# Altium PCB PCB2.PcbDoc
Units mm, origin at the board's own origin, x right, y up, seen from the top; angles counter-clockwise.
Board outline 152.4 x 101.6 mm, 2 copper layers (Top Layer, Bottom Layer); 29 components, 36 nets, 113 pads, 2 vias.
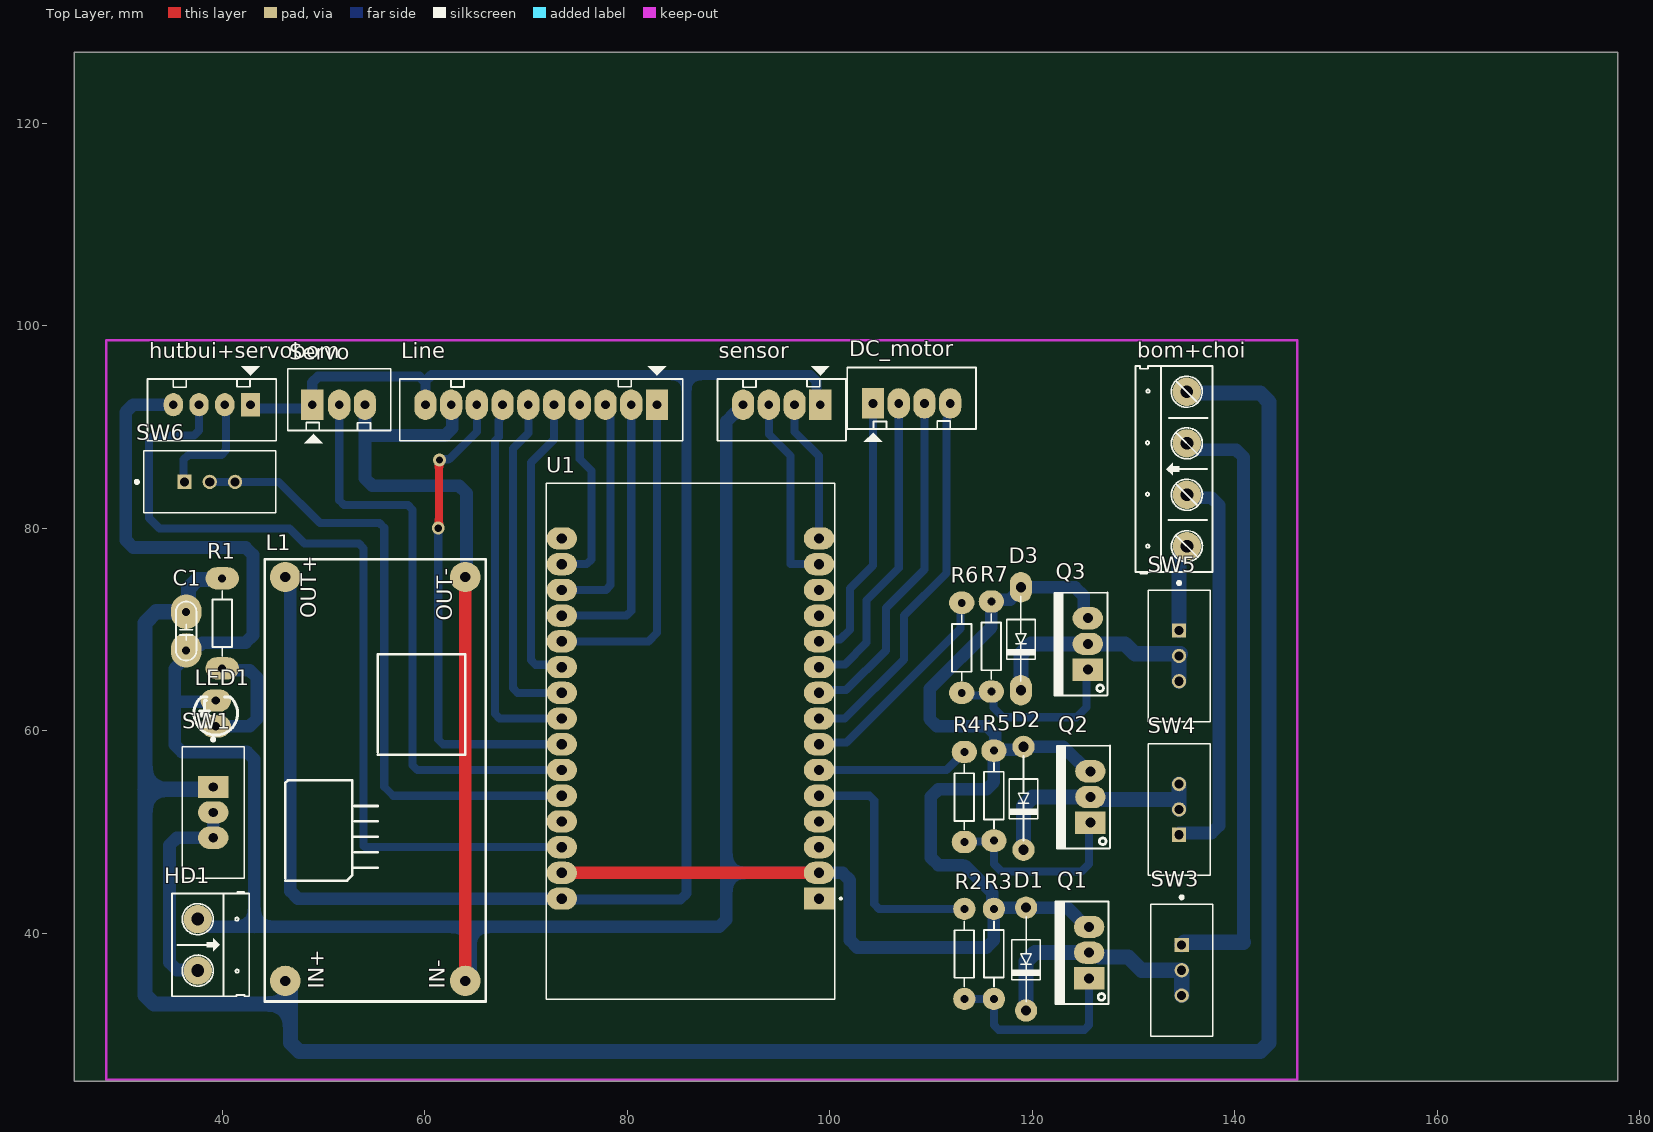
[diagram p0: Top Layer view]
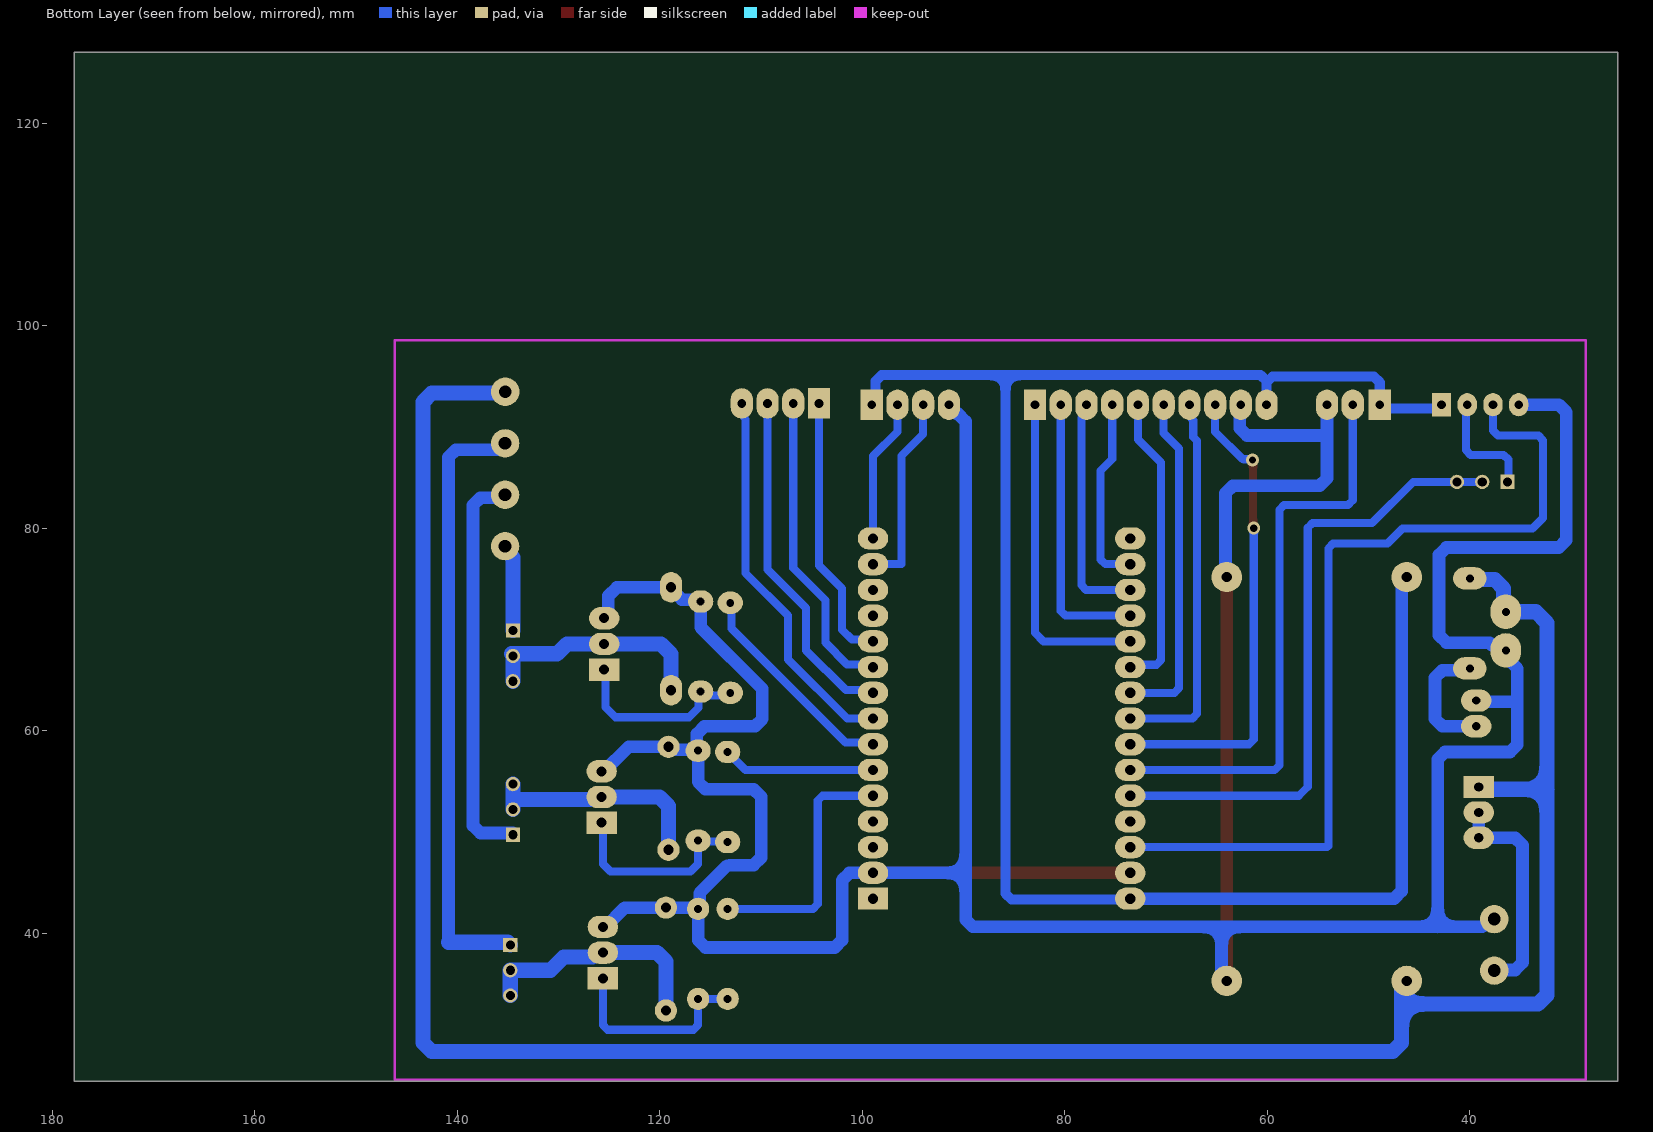
[diagram p1: Bottom Layer view, seen from below]
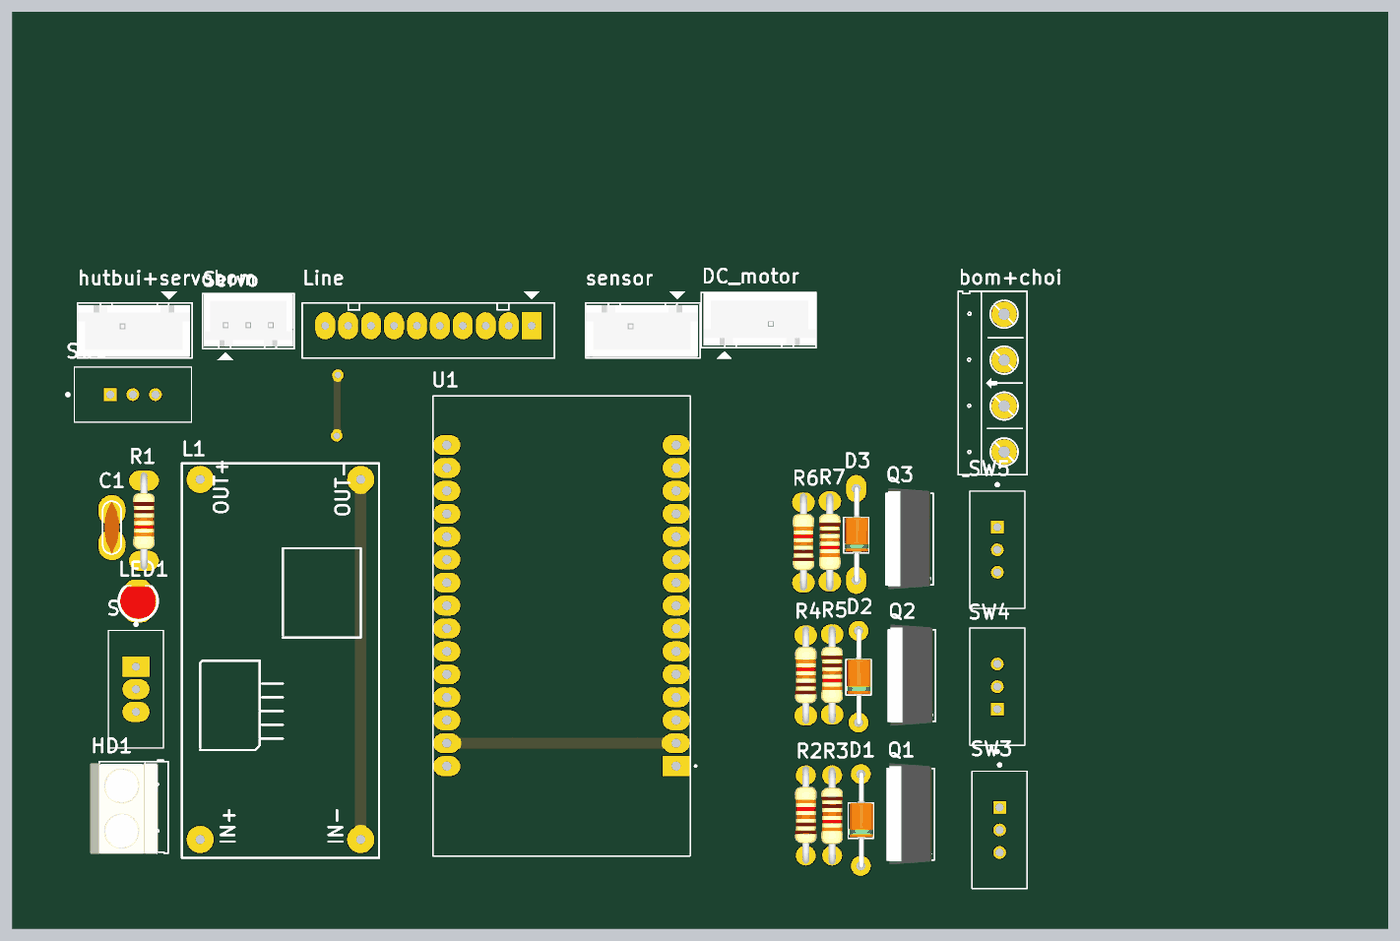
[diagram p2: 3D render of the assembled board from above, using the file's embedded part models]

## Layer stack, top to bottom
Top Solder: solder mask 0.0102, Solder Resist, Dk 3.5
Top Layer: signal copper 0.0356
Dielectric 1: dielectric 0.32, FR-4, Dk 4.8
Bottom Layer: signal copper 0.0356
Bottom Solder: solder mask 0.0102, Solder Resist, Dk 3.5

## Board outline
25.4,25.4 177.8,25.4 177.8,127 25.4,127

## Design rules (kind name [scope] priority, off if disabled: settings)
Clearance [All] p1: gap=0.254 ignorepadtopadclearanceinfootprint=FALSE except(0: Arc-Hole Track-Hole SMDPad-Hole THPad-Hole Via-Hole Fill-Hole Poly-Hole Region-Hole Text-Hole)
PolygonConnect [All] p1: connectstyle=Relief reliefconductorwidth=0.254 reliefentries=4 polygonreliefangle="90 Angle" airgapwidth=0.254
RoutingVias [All] p1: holewidth=0.711 width=1.27 viastyle="Through Hole" minholewidth=0.711 minwidth=1.27 maxholewidth=0.711 maxwidth=1.27
SolderMaskExpansion [All] p1: expansion=0.102 istentingtop=FALSE
Width [All] p1: maxlimit=1.5 minlimit=0.8 preferedwidth=1
30 further rules are at their usual default settings.

## Components (designator, comment, footprint, x,y, rotation, side; value= is the part's Value field where it differs from the comment)
bom+choi "Header 4" HED4 135.257,78.23 r90 top
C1 "Cap Non-Pol" CN1.5 36.449,67.945 r90 top value=100pF
D1 "Diode" DIO-1A#1 119.38,42.545 r270 top value=1N5007
D2 "Diode" DIO-1A#1 119.126,58.42 r270 top value=1N5007
D3 "Diode" DIO-1A#2 118.872,74.168 r270 top value=1N5007
DC_motor "JP4" CON4#1 104.267,92.329 r0 top value="Connector 4"
HD1 "Header 2" HED2 37.592,41.402 r270 top
hutbui+servobom "JP4" CON4#2 42.799,92.202 r180 top value="Connector 4"
L1 "BUCK_LM2596" BUCK_LM2596 54.356,54.864 r90 top
LED1 "LED_R_3" LED3R 39.37,60.452 r90 top value=Red
Line "JP10" CON10 82.931,92.202 r180 top value="Connector 10"
Q1 "TIP122" QTO-220 125.603,35.56 r90 top
Q2 "TIP122" QTO-220 125.73,50.927 r90 top
Q3 "TIP122" QTO-220 125.476,66.04 r90 top
R1 "Res1" R1/4W#1 40.005,66.167 r90 top value=10K
R2 "Res1" R1/4W#2 113.284,42.418 r270 top value=10K
R3 "Res1" R1/4W#2 116.205,33.528 r90 top value=10K
R4 "Res1" R1/4W#3 113.284,57.912 r270 top value=10K
R5 "Res1" R1/4W#3 116.205,49.149 r90 top value=10K
R6 "Res1" R1/4W#3 113.03,72.644 r270 top value=10K
R7 "Res1" R1/4W#3 115.951,63.881 r90 top value=10K
sensor "JP4" CON4#1 99.06,92.202 r180 top value="Connector 4"
Servo "JP3" CON3 49.022,92.202 r0 top value="Connector 3"
SW1 "1825159-1" SW_1825159-1#1 39.116,51.943 r270 top
SW3 "1825159-1" SW_1825159-1#2 134.747,36.362 r270 top
SW4 "1825159-1" SW_1825159-1#2 134.493,52.237 r90 top
SW5 "1825159-1" SW_1825159-1#2 134.493,67.397 r270 top
SW6 "1825159-1" SW_1825159-1#2 38.775,84.582 r0 top
U1 "ESP32-DEVKIT-V1" MODULE_ESP32_DEVKIT_V1 86.233,58.949 r180 top

## Footprints (in the part's own frame and the unit in brackets; to place one, negate y for a bottom-side part, rotate by r counter-clockwise, add the part's x,y. Pads: shape width x height; smd on the part's side, far side on the other; paste and mask are expansions set on the pad)
BUCK_LM2596 [mil]
  round 118.11 hole 40: 1(-770,320) 2(-770,-380) 3(800,-380) 4(800,320)
  silkscreen extent -850,-460 870,400
CN1.5 [mm]
  oval 3.4x3 hole 0.787: 1(0,0) 2(3.81,0)
  silkscreen extent -1.01,-1.02 4.82,1.02, body extent -1.01,-0.85 4.83,0.85, height 5.97
CON3 [mm] "CON 3"
  rect 2.2x3 hole 0.864: 1(-0.127,0)
  oval 2.2x3 hole 0.864: 2(2.54,0) 3(5.08,0)
  silkscreen extent -2.54,-3.8 7.62,3.56, body extent -2.41,-2.29 7.49,3.46, height 7
CON4#1 [mm] "CON4"
  rect 2.2x3 hole 0.864: 1(0,0)
  oval 2.2x3 hole 0.864: 2(2.54,0) 3(5.08,0) 4(7.62,0)
  silkscreen extent -2.54,-3.8 10.16,3.56, body extent -2.29,-2.29 10.11,3.46, height 7
CON4#2 [mm] "CON4"
  rect 1.905x2.286 hole 0.864: 1(0,0)
  oval 1.905x2.286 hole 0.864: 2(2.54,0) 3(5.08,0) 4(7.62,0)
  silkscreen extent -2.54,-3.8 10.16,3.56, body extent -2.29,-2.29 10.11,3.46, height 7
CON10 [mm] "CON10"
  rect 2.2x3 hole 0.864: 1(0,0)
  oval 2.2x3 hole 0.864: 2(2.54,0) 3(5.08,0) 4(7.62,0) 5(10.16,0) 6(12.7,0) 7(15.24,0) 8(17.78,0) 9(20.32,0) 10(22.86,0)
  silkscreen extent -2.54,-3.8 25.4,3.56
DIO-1A#1 [mm]
  round 2.2 hole 1.016: 1(0,0) 2(10.16,0)
  silkscreen extent 0.89,-1.4 9.27,1.4, body extent -0.28,-1.27 10.44,1.38, height 2.6
DIO-1A#2 [mm]
  oval 3x2.2 hole 1.016: 1(0,0) 2(10.16,0)
  silkscreen extent 0.89,-1.4 9.27,1.4, body extent -0.28,-1.27 10.44,1.38, height 2.6
HED2 [mil] "Header 2, 2 pin, hight 300mil, Pin to Pin 200, Colour Green"
  round 110 hole 50: 1(0,0) 2(200,0)
  silkscreen extent -106,-100 300,200, body extent -92,-140 302,155, height 394
HED4 [mil] "Header 4, 4 pin, hight 300mil, Pin to Pin 200, Colour Green"
  round 110 hole 50: 1(0,0) 2(200,0) 3(400.06,0.06) 4(600.39,0.39)
  silkscreen extent -106,-100 700,200
LED3R [mm]
  oval 2.2x3 hole 0.8: 1(0,0) 2(2.54,0)
  silkscreen extent -0.88,-2.15 2.87,2.15, body extent -0.73,-2 2.94,2, height 4.6
MODULE_ESP32_DEVKIT_V1 [mm]
  rect 3x2.2 hole 1.02: 1(-12.7,15.515)
  oval 3x2.2 hole 1.02: 2(-12.7,12.975) 3(-12.7,10.435) 4(-12.7,7.895) 5(-12.7,5.355) 6(-12.7,2.815) 7(-12.7,0.275) 8(-12.7,-2.265) 9(-12.7,-4.805) 10(-12.7,-7.345) 11(-12.7,-9.885) 12(-12.7,-12.425) 13(-12.7,-14.965) 14(-12.7,-17.505) 15(-12.7,-20.045) 16(12.7,-20.045) 17(12.7,-17.505) 18(12.7,-14.965) 19(12.7,-12.425) 20(12.7,-9.885) 21(12.7,-7.345) 22(12.7,-4.805) 23(12.7,-2.265) 24(12.7,0.275) 25(12.7,2.815) 26(12.7,5.355) 27(12.7,7.895) 28(12.7,10.435) 29(12.7,12.975) 30(12.7,15.515)
  silkscreen extent -14.95,-25.48 14.23,25.48
QTO-220 [mm] "TO-220 - 1-2-3"
  rect 2.2x3 hole 0.991: 1(0,0)
  oval 2.2x3 hole 0.991: 2(2.54,0) 3(5.08,0)
  silkscreen extent -2.54,-1.93 7.62,3.3, body extent -3.02,-1.63 8.19,3.06, height 19.17
R1/4W#1 [mm] "R 1/4W, 2 Pin, 350mil"
  oval 2.2x3.3 hole 0.787: 1(0,0) 2(8.89,0)
  silkscreen extent 1.22,-0.97 7.67,0.97, body extent -1.01,-1.19 9.79,1.21, height 2.83
R1/4W#2 [mm] "R 1/4W, 2 Pin, 350mil"
  round 2.2 hole 0.787: 1(0,0) 2(8.89,0)
  silkscreen extent 1.22,-0.97 7.67,0.97, body extent -1.01,-1.19 9.79,1.21, height 2.83
R1/4W#3 [mm] "R 1/4W, 2 Pin, 350mil"
  oval 2.2x2.5 hole 0.787: 1(0,0) 2(8.89,0)
  silkscreen extent 1.22,-0.97 7.67,0.97, body extent -1.01,-1.19 9.79,1.21, height 2.83
SW_1825159-1#1 [mm]
  rect 2.2x3 hole 0.9: 1(-2.5,0)
  oval 2.2x3 hole 0.9: 2(0,0) 3(2.5,0)
  silkscreen extent -7.35,-3.05 6.5,3.05
SW_1825159-1#2 [mm]
  rect 1.408x1.408 hole 0.9: 1(-2.5,0)
  round 1.408 hole 0.9: 2(0,0) 3(2.5,0)
  silkscreen extent -7.35,-3.05 6.5,3.05

## Part data
bom+choi: library part Hed4, "Header 4 (Green)"
C1: "Capacitor"
D1 D2 D3: "Default Diode", Code - JEDEC=DO-214-AB, Published=8-Jun-2000, Publisher="Altium Limited", Revision="July-2002: Re-released for DXP Platform."
DC_motor hutbui+servobom sensor: library part Con4, "Connector 4"
HD1: library part Hed2, "Header 2 (Green)"
LED1: library part LED_RED_3MM, "LED Red 3mm", ComponentLink1Description=Datasheet, ComponentLink1URL="D:\Dropbox\Datasheets\Opto and Illumination\LEDs\SMD LED.pdf", Unit Price=0.0476
Line: library part Con10, "Connector 10"
Q1 Q2 Q3: "Darlington Silicon Power NPN Transistor, 8 Amp, 100 Volts and 65 Watts"
R1 R2 R3 R4 R5 R6 R7: library part Res1_1, "Resistor", Manufacturer="Generic Components", Class=Passive, Published=08/06/2000, Publisher="Altium Hobart Technology Centre", SubClass=Resistor
Servo: library part Con3, "Connector 3"
SW1 SW3 SW4 SW5 SW6: "Slide Switch SPDT Through Hole", Contact_Current_Rating=".25 A", Package=None, Availability=Unavailable, Configuration_Pole-Throw="Single Pole - Double Throw", EU_RoHS_Compliance=Compliant, MF="TE Connectivity", MP=1825159-1, Price=None, SnapEDA_Link=https://www.snapeda.com/parts/1825159-1/TE%20Connectivity%20ALCOSWITCH%20Switches/view-part/235580/?ref=snap, Switch_Type=Slide, TE_purchase_URL=https://www.te.com/usa-en/product-1825159-1.html?te_bu=Cor&te_type=disp&te_campaign=seda_glo_cor-seda-global-disp-prtnr-fy19-seda-model-bom-cta_sma-317_1&elqCampaignId=32493
U1: "Dual core, Wi-Fi: 2.4 GHz up to 150 Mbits/s,BLE (Bluetooth Low Energy) and legacy Bluetooth, 32 bits, Up to 240 MHz", Package=None, Availability=Unavailable, MP=ESP32-DEVKIT-V1, Price=None

## Via types
v1: diameter 1.27, hole 0.711, Top Layer to Bottom Layer, 2 vias

## Nets (pads, with @x,y where several pads share a name; then routed paths per layer and width w, separated by ;. In a path a pad name is that pad's centre, name@x,y a point inside that pad or via, vN(x,y) a via of type N, cw(c..) or ccw(c..) an arc to the next point about the centre after c; other vN are vias at no path point)
5V: hutbui+servobom.1 L1.4 Line.10 sensor.1 Servo.1 U1.30 | length 185.9
  Bottom Layer w1: hutbui+servobom.1@43.307,91.821 48.514,91.821 Servo.1 48.895,94.41 49.481,94.996 59.485,94.996 60.071,94.41 ; Line.10 60.071,94.41 ; U1.30 73.627,43.34 85.266,43.34 85.852,43.926 85.852,95.123 ; sensor.1@98.806,92.01 98.674,92.142 98.674,94.537 98.088,95.123 85.852,95.123 ; 60.071,94.41 60.071,94.537 60.657,95.123 85.852,95.123
  Bottom Layer w1.25: L1.4@46.736,75.565 46.736,44.166 47.468,43.434 U1.30
12V: bom+choi.4 C1.2 L1.1 R1.2 SW1.1 | length 244.6
  Bottom Layer w1.5: SW1.1 38.902,54.229 32.385,54.229 ; R1.2 39.878,74.93 37.542,74.93 36.663,74.051 36.663,71.969 C1.2 33.486,71.755 32.385,70.654 32.385,54.229 ; L1.1@46.736,35.687 46.736,33.02 ; bom+choi.4 135.382,93.345 142.504,93.345 143.383,92.466 143.383,29.2 142.504,28.321 47.615,28.321 46.736,29.2 46.736,33.02 ; 32.385,54.229 32.385,33.899 33.264,33.02 46.736,33.02
bom1: R6.1 U1.7 | length 21.2
  Bottom Layer w0.8: U1.7 99.093,58.834 101.633,58.834 112.891,70.092 R6.1@112.891,72.617
bom1(am): bom+choi.1 SW5.1 | length 8.6
  Bottom Layer w1.5: SW5.1 134.493,77.117 135.257,77.88 bom+choi.1
bom2: R4.1 U1.6 | length 15.1
  Bottom Layer w0.8: U1.6 111.506,56.134 R4.1
bom2(am): bom+choi.2 SW4.1 | length 39.7
  Bottom Layer w1.25: SW4.1@134.493,49.911 137.698,49.911 138.43,50.643 138.43,82.283 137.698,83.015 bom+choi.2@134.958,83.015
button: U1.3
choi: R2.1 U1.5 | length 25
  Bottom Layer w0.8: U1.5 103.925,53.594 104.394,53.125 104.394,42.887 104.863,42.418 R2.1
choi(am): bom+choi.3 SW3.1 | length 60
  Bottom Layer w1.25: bom+choi.3@135.255,87.757 140.111,87.757 140.843,87.025 140.843,39.116
  Bottom Layer w1.5: SW3.1 135.001,39.116 140.843,39.116
ECHO: sensor.3 U1.14 | length 19.8
  Bottom Layer w0.8: sensor.3@94.234,91.948 sensor.3 93.98,89.281 96.139,87.122 96.139,76.454 U1.14
GND: C1.1 D1.1 D2.1 D3.1 HD1.1 hutbui+servobom.4 L1.2 L1.3 LED1.2 Line.9 Q1.3 Q2.3 Q3.3 R3.2 R5.2 R7.2 sensor.4 Servo.3 U1.2 U1.29 | length 413.8
  Top Layer w1.25: L1.2 L1.3 ; U1.29 U1.2
  Bottom Layer w1.25: hutbui+servobom.4 31.212,92.202 30.48,91.47 30.48,78.837 31.212,78.105 42.321,78.105 43.053,77.373 43.053,69.439 42.321,68.707 38.056,68.707 37.829,68.48 36.984,68.48 C1.1 36.449,67.281 35.306,66.138 35.306,62.484 ; HD1.1 38.01,41.402 38.772,40.64 43.18,40.64 ; LED1.2 39.243,62.865 35.687,62.865 35.306,62.484 ; Servo.3 54.102,84.933 54.834,84.201 63.403,84.201 64.135,83.469 64.135,75.311 L1.3 ; 54.834,89.154 62.004,89.154 62.736,89.886 62.736,92.077 Line.9 ; L1.2@64.516,35.687 64.516,40.64 ; sensor.4 91.44,92.059 90.708,91.327 90.565,91.327 89.789,90.551 89.789,45.974 ; 113.062,46.736 110.714,46.736 109.982,47.468 109.982,53.497 110.714,54.229 115.473,54.229 116.205,54.961 R5.2 R5.2@116.306,58.14 ; 113.332,46.688 116.05,43.97 116.05,42.573 R3.2 ; Q3.3 125.072,71.524 125.072,73.309 124.213,74.168 D3.1 118.872,74.025 117.8,72.953 116.133,72.953 R7.2 115.951,70.231 109.855,64.135 109.855,61.184 110.587,60.452 115.57,60.452 116.332,59.69 116.332,58.166 R5.2@116.306,58.14 ; Q1.3 125.349,40.64 123.444,42.545 D1.1 119.354,42.519 116.306,42.519 R3.2 ; Q2.3 125.476,56.007 123.063,58.42 D2.1 118.983,58.42 118.703,58.14 R5.2@116.306,58.14 ; 35.306,62.484 35.306,58.644 36.038,57.912 42.448,57.912 43.18,57.18 43.18,40.64 ; 43.18,40.64 64.516,40.64 ; 64.516,40.64 89.057,40.64 89.789,41.372 89.789,45.974 ; 89.789,45.974 U1.2 101.249,45.974 101.981,45.242 101.981,39.34 102.713,38.608 115.473,38.608 116.205,39.34 R3.2
hutbui: SW6.2 SW6.3 U1.26 | length 62.1
  Bottom Layer w0.8: SW6.2 SW6.3 ; SW6.3@41.703,84.582 45.593,84.582 49.657,80.518 55.538,80.518 56.007,80.049 56.007,54.483 56.896,53.594 U1.26
IN1: DC_motor.1 U1.11 | length 26.8
  Bottom Layer w0.8: U1.11 99.117,69.018 101.022,69.018 101.981,69.977 101.981,74.041 104.267,76.327 DC_motor.1
IN2: DC_motor.2 U1.10 | length 30.6
  Bottom Layer w0.8: U1.10 99.197,66.558 101.483,66.558 103.632,68.707 103.632,72.898 106.807,76.073 DC_motor.2
IN3: DC_motor.3 U1.9 | length 34.3
  Bottom Layer w0.8: U1.9 99.201,64.022 101.614,64.022 105.537,67.945 105.537,72.136 109.347,75.946 DC_motor.3
IN4: DC_motor.4 U1.8 | length 38
  Bottom Layer w0.8: U1.8 101.473,61.214 107.315,67.056 107.315,71.374 111.506,75.565 111.506,90.76 111.619,90.873 111.619,92.061 DC_motor.4
line1: Line.4 U1.17 | length 18.9
  Bottom Layer w0.8: U1.17 75.985,76.454 76.454,76.923 76.454,85.686 75.311,86.829 Line.4
line2: Line.3 U1.18 | length 23
  Bottom Layer w0.8: U1.18 77.89,73.914 78.359,74.383 78.359,90.915 77.851,91.423 Line.3
line3: Line.2 U1.19 | length 27.4
  Bottom Layer w0.8: U1.19 79.922,71.374 80.391,71.843 Line.2
line4: Line.1 U1.20 | length 32.3
  Bottom Layer w0.8: U1.20 82.081,68.834 82.931,69.684 Line.1
line5: Line.5 U1.21 | length 29.5
  Bottom Layer w0.8: Line.5 72.771,88.773 70.485,86.487 70.485,66.992 70.954,66.524 73.303,66.524 U1.21
line6: Line.6 U1.22 | length 33.6
  Bottom Layer w0.8: Line.6 70.231,89.408 68.707,87.884 68.707,64.223 69.176,63.754 U1.22
line7: Line.7 U1.23 | length 37.6
  Bottom Layer w0.8: Line.7 67.423,91.934 67.423,90.746 67.31,90.633 67.31,89.027 66.929,88.646 66.929,61.683 67.398,61.214 U1.23
line8: Line.8 U1.24 | length 47.5
  Top Layer w0.8: v1(61.341,80.01) 61.404,80.073 61.404,86.677 v1(61.468,86.741)
  Bottom Layer w0.8: v1(61.341,80.01) 61.341,59.143 61.81,58.674 U1.24 ; v1(61.468,86.741) 61.558,86.831 62.447,86.831 65.151,89.535 Line.8
NetD1_2: D1.2 Q1.2 SW3.2 SW3.3 | length 23.8
  Bottom Layer w1.5: D1.2 119.38,37.221 120.259,38.1 126.192,38.1 126.628,37.664 129.468,37.664 130.77,36.362 SW3.2 SW3.3
NetD2_2: D2.2 Q2.2 SW4.2 SW4.3 | length 22.7
  Bottom Layer w1.5: D2.2 119.126,52.588 120.005,53.467 Q2.2 125.864,53.333 126.759,53.333 126.879,53.213 134.493,53.213 ; SW4.2 134.493,53.213 ; SW4.3 134.493,53.213
NetD3_2: D3.2 Q3.2 SW5.2 SW5.3 | length 22.6
  Bottom Layer w1.5: D3.2 118.872,67.574 119.878,68.58 Q3.2 129.159,68.58 130.135,67.604 SW5.2@134.62,67.604 ; SW5.3 SW5.2
NetHD1_2: HD1.2 SW1.2 SW1.3 | length 21.8
  Bottom Layer w1.25: HD1.2 37.526,36.388 35.53,36.388 34.798,37.12 34.798,48.711 35.53,49.443 SW1.3 SW1.2
Nethutbui+servobom_2: hutbui+servobom.2 SW6.1 | length 11.3
  Bottom Layer w0.8: SW6.1 36.195,84.662 36.195,86.78 36.664,87.249 39.917,87.249 40.386,87.718 40.386,92.075 hutbui+servobom.2
NetLED1_1: LED1.1 R1.1 | length 11.9
  Bottom Layer w1.25: LED1.1 42.702,60.452 43.434,61.184 43.434,65.253 42.702,65.985 40.568,65.985 R1.1@40.386,66.167
NetQ1_1: Q1.1 R2.2 R3.1 | length 19.9
  Bottom Layer w0.8: R2.2 R3.1 116.205,30.949 116.674,30.48 125.134,30.48 125.603,30.949 Q1.1
NetQ2_1: Q2.1 R4.2 R5.1 | length 19.4
  Bottom Layer w0.8: R4.2 113.347,49.085 116.141,49.085 R5.1 116.205,46.833 116.937,46.101 124.871,46.101 125.603,46.833 125.603,50.8 Q2.1
NetQ3_1: Q3.1 R6.2 R7.1 | length 18.5
  Bottom Layer w0.8: R6.2 113.298,63.486 R7.1@115.951,63.486 ; R7.1 R7.1@115.951,63.486 ; Q3.1 125.349,65.913 125.349,62.327 124.363,61.341 117.094,61.341 116.154,62.281 116.154,63.283 R7.1@115.951,63.486
servobom: hutbui+servobom.3 U1.28 | length 87
  Bottom Layer w0.8: hutbui+servobom.3 37.719,89.662 37.211,89.154 33.235,89.154 32.766,88.685 32.766,81.026 33.825,79.967 46.652,79.967 48.133,78.486 53.507,78.486 53.975,78.017 53.975,48.641 54.102,48.514 U1.28
servotuhanh: Servo.2 U1.25 | length 57.2
  Bottom Layer w0.8: Servo.2 51.562,82.765 52.031,82.296 58.332,82.296 58.801,81.827 58.801,56.603 59.27,56.134 U1.25
TRIG: sensor.2 U1.15 | length 14.2
  Bottom Layer w0.8: sensor.2 96.52,89.535 98.933,87.122 U1.15
pads on no net: U1.1 U1.4 U1.12 U1.13 U1.16 U1.27

## Keep-outs
Keep-Out Layer:
  lines w0.254: 28.575,25.527 146.177,25.527 146.177,98.552 28.575,98.552 28.575,25.527

## Text inside footprints (layer, text, board x,y; h text height)
L1: Top Overlay "IN+" at 50.038,34.544 h1.52 r90; Top Overlay "IN-" at 61.976,34.544 h1.52 r90; Top Overlay "OUT+" at 49.276,71.12 h1.52 r90; Top Overlay "OUT-" at 62.738,70.866 h1.52 r90